# Altium PCB ISO-ASS[3]-VB.PcbDoc
Units mm, origin at the board's own origin, x right, y up, seen from the top; angles counter-clockwise.
Board outline 240 x 70 mm, 3 copper layers (Top Layer, MidLayer1, Bottom Layer); 157 components, 49 nets, 745 pads, 0 vias.
Unrouted connection lines stored in the file: 696.
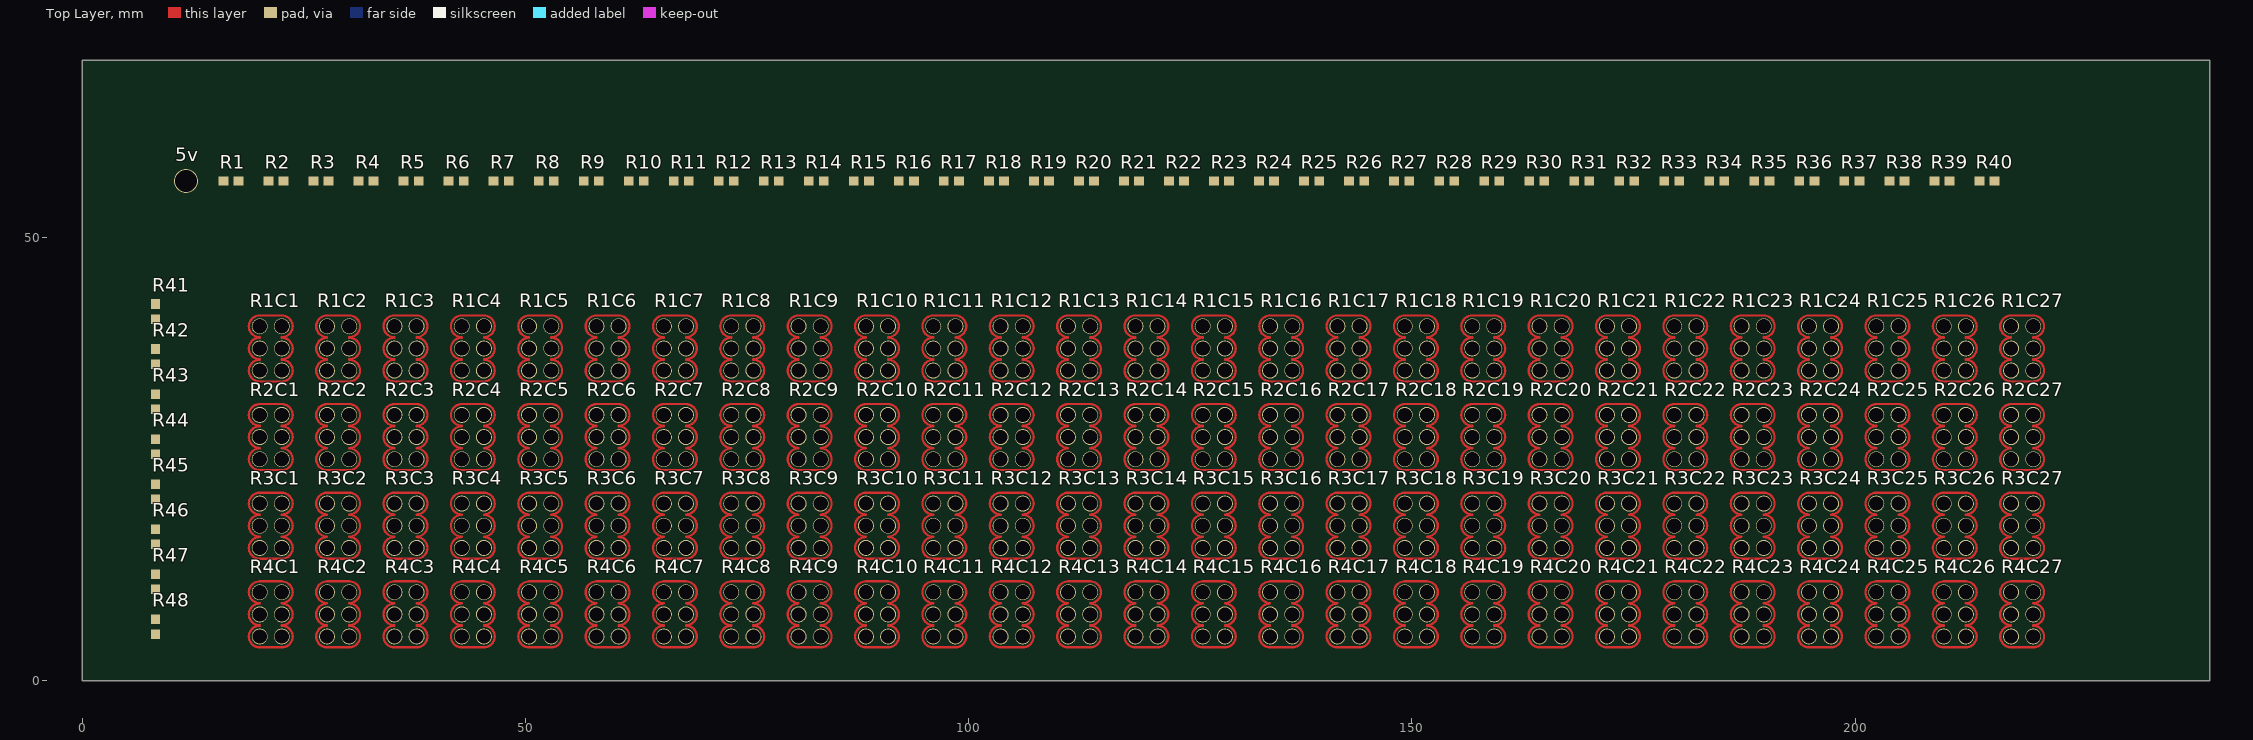
[diagram p0: Top Layer view]
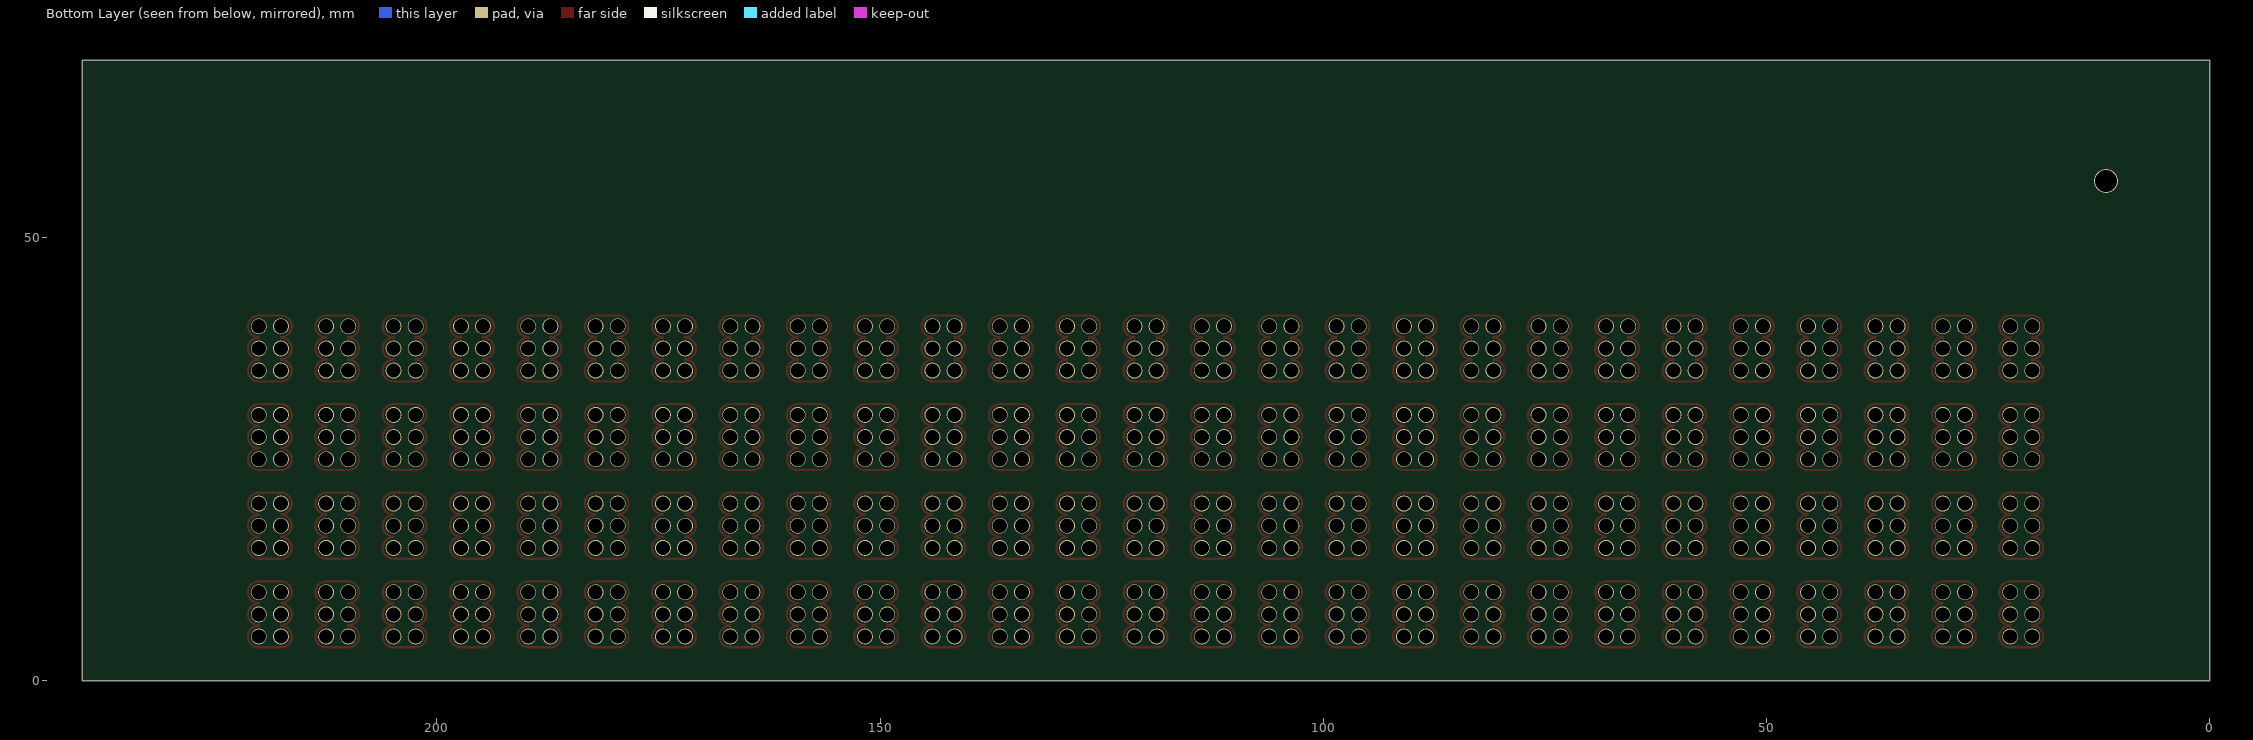
[diagram p1: Bottom Layer view, seen from below]

## Layer stack, top to bottom
Top Layer: signal copper 0.0356
Dielectric: core 0.32, FR-4, Dk 4.8
MidLayer1: signal copper 0.0356
Dielectric: prepreg 0.32, FR-4, Dk 4.8
Bottom Layer: signal copper 0.0356

## Board outline
0,0 240,0 240,70 0,70 0,0

## Design rules (kind name [scope] priority, off if disabled: settings)
Clearance [All] p1: gap=0.254
PolygonConnect [All] p1: connectstyle=Relief reliefconductorwidth=0.254 reliefentries=4 polygonreliefangle="90 Angle"
RoutingVias [All] p1: holewidth=0.711 width=1.27 viastyle="Through Hole" minholewidth=0.711 minwidth=1.27 maxholewidth=0.711 maxwidth=1.27
SilkscreenOverComponentPads [All] p1: minsilkscreentomaskgap=0.254
SolderMaskExpansion [All] p1: expansion=0.102
TestPointUsage [All] p1: valid=0 allowmultiple=FALSE
Testpoint [All] p1: side=15 testpointundercomponent=TRUE minsize=1.016 maxsize=2.54 preferedsize=1.524 minholesize=0 maxholesize=1.016 preferedholesize=0.813 testpointgrid=0.025 style=1023 order=0-112345678
Width [All] p1: maxlimit=0.254 minlimit=0.254 preferedwidth=0.254
23 further rules are at their usual default settings.

## Components (designator, comment, footprint, x,y, rotation, side; value= is the part's Value field where it differs from the comment)
5v "5v" 5v 11.684,56.388 r180 top
R1 "ERA3Y" ERA-0603 16.764,56.388 r180 top
R1C1 "BC-ASS[3]" BC-ASS[3] 20,35 r0 top
R1C2 "BC-ASS[3]" BC-ASS[3] 27.6,35 r0 top
R1C3 "BC-ASS[3]" BC-ASS[3] 35.2,35 r0 top
R1C4 "BC-ASS[3]" BC-ASS[3] 42.8,35 r0 top
R1C5 "BC-ASS[3]" BC-ASS[3] 50.4,35 r0 top
R1C6 "BC-ASS[3]" BC-ASS[3] 58,35 r0 top
R1C7 "BC-ASS[3]" BC-ASS[3] 65.6,35 r0 top
R1C8 "BC-ASS[3]" BC-ASS[3] 73.2,35 r0 top
R1C9 "BC-ASS[3]" BC-ASS[3] 80.8,35 r0 top
R1C10 "BC-ASS[3]" BC-ASS[3] 88.4,35 r0 top
R1C11 "BC-ASS[3]" BC-ASS[3] 96,35 r0 top
R1C12 "BC-ASS[3]" BC-ASS[3] 103.6,35 r0 top
R1C13 "BC-ASS[3]" BC-ASS[3] 111.2,35 r0 top
R1C14 "BC-ASS[3]" BC-ASS[3] 118.8,35 r0 top
R1C15 "BC-ASS[3]" BC-ASS[3] 126.4,35 r0 top
R1C16 "BC-ASS[3]" BC-ASS[3] 134,35 r0 top
R1C17 "BC-ASS[3]" BC-ASS[3] 141.6,35 r0 top
R1C18 "BC-ASS[3]" BC-ASS[3] 149.2,35 r0 top
R1C19 "BC-ASS[3]" BC-ASS[3] 156.8,35 r0 top
R1C20 "BC-ASS[3]" BC-ASS[3] 164.4,35 r0 top
R1C21 "BC-ASS[3]" BC-ASS[3] 172,35 r0 top
R1C22 "BC-ASS[3]" BC-ASS[3] 179.6,35 r0 top
R1C23 "BC-ASS[3]" BC-ASS[3] 187.2,35 r0 top
R1C24 "BC-ASS[3]" BC-ASS[3] 194.8,35 r0 top
R1C25 "BC-ASS[3]" BC-ASS[3] 202.4,35 r0 top
R1C26 "BC-ASS[3]" BC-ASS[3] 210,35 r0 top
R1C27 "BC-ASS[3]" BC-ASS[3] 217.6,35 r0 top
R2 "ERA3Y" ERA-0603 21.844,56.388 r0 top
R2C1 "BC-ASS[3]" BC-ASS[3] 20,25 r0 top
R2C2 "BC-ASS[3]" BC-ASS[3] 27.6,25 r0 top
R2C3 "BC-ASS[3]" BC-ASS[3] 35.2,25 r0 top
R2C4 "BC-ASS[3]" BC-ASS[3] 42.8,25 r0 top
R2C5 "BC-ASS[3]" BC-ASS[3] 50.4,25 r0 top
R2C6 "BC-ASS[3]" BC-ASS[3] 58,25 r0 top
R2C7 "BC-ASS[3]" BC-ASS[3] 65.6,25 r0 top
R2C8 "BC-ASS[3]" BC-ASS[3] 73.2,25 r0 top
R2C9 "BC-ASS[3]" BC-ASS[3] 80.8,25 r0 top
R2C10 "BC-ASS[3]" BC-ASS[3] 88.4,25 r0 top
R2C11 "BC-ASS[3]" BC-ASS[3] 96,25 r0 top
R2C12 "BC-ASS[3]" BC-ASS[3] 103.6,25 r0 top
R2C13 "BC-ASS[3]" BC-ASS[3] 111.2,25 r0 top
R2C14 "BC-ASS[3]" BC-ASS[3] 118.8,25 r0 top
R2C15 "BC-ASS[3]" BC-ASS[3] 126.4,25 r0 top
R2C16 "BC-ASS[3]" BC-ASS[3] 134,25 r0 top
R2C17 "BC-ASS[3]" BC-ASS[3] 141.6,25 r0 top
R2C18 "BC-ASS[3]" BC-ASS[3] 149.2,25 r0 top
R2C19 "BC-ASS[3]" BC-ASS[3] 156.8,25 r0 top
R2C20 "BC-ASS[3]" BC-ASS[3] 164.4,25 r0 top
R2C21 "BC-ASS[3]" BC-ASS[3] 172,25 r0 top
R2C22 "BC-ASS[3]" BC-ASS[3] 179.6,25 r0 top
R2C23 "BC-ASS[3]" BC-ASS[3] 187.2,25 r0 top
R2C24 "BC-ASS[3]" BC-ASS[3] 194.8,25 r0 top
R2C25 "BC-ASS[3]" BC-ASS[3] 202.4,25 r0 top
R2C26 "BC-ASS[3]" BC-ASS[3] 210,25 r0 top
R2C27 "BC-ASS[3]" BC-ASS[3] 217.6,25 r0 top
R3 "ERA3Y" ERA-0603 26.924,56.388 r180 top
R3C1 "BC-ASS[3]" BC-ASS[3] 20,15 r0 top
R3C2 "BC-ASS[3]" BC-ASS[3] 27.6,15 r0 top
R3C3 "BC-ASS[3]" BC-ASS[3] 35.2,15 r0 top
R3C4 "BC-ASS[3]" BC-ASS[3] 42.8,15 r0 top
R3C5 "BC-ASS[3]" BC-ASS[3] 50.4,15 r0 top
R3C6 "BC-ASS[3]" BC-ASS[3] 58,15 r0 top
R3C7 "BC-ASS[3]" BC-ASS[3] 65.6,15 r0 top
R3C8 "BC-ASS[3]" BC-ASS[3] 73.2,15 r0 top
R3C9 "BC-ASS[3]" BC-ASS[3] 80.8,15 r0 top
R3C10 "BC-ASS[3]" BC-ASS[3] 88.4,15 r0 top
R3C11 "BC-ASS[3]" BC-ASS[3] 96,15 r0 top
R3C12 "BC-ASS[3]" BC-ASS[3] 103.6,15 r0 top
R3C13 "BC-ASS[3]" BC-ASS[3] 111.2,15 r0 top
R3C14 "BC-ASS[3]" BC-ASS[3] 118.8,15 r0 top
R3C15 "BC-ASS[3]" BC-ASS[3] 126.4,15 r0 top
R3C16 "BC-ASS[3]" BC-ASS[3] 134,15 r0 top
R3C17 "BC-ASS[3]" BC-ASS[3] 141.6,15 r0 top
R3C18 "BC-ASS[3]" BC-ASS[3] 149.2,15 r0 top
R3C19 "BC-ASS[3]" BC-ASS[3] 156.8,15 r0 top
R3C20 "BC-ASS[3]" BC-ASS[3] 164.4,15 r0 top
R3C21 "BC-ASS[3]" BC-ASS[3] 172,15 r0 top
R3C22 "BC-ASS[3]" BC-ASS[3] 179.6,15 r0 top
R3C23 "BC-ASS[3]" BC-ASS[3] 187.2,15 r0 top
R3C24 "BC-ASS[3]" BC-ASS[3] 194.8,15 r0 top
R3C25 "BC-ASS[3]" BC-ASS[3] 202.4,15 r0 top
R3C26 "BC-ASS[3]" BC-ASS[3] 210,15 r0 top
R3C27 "BC-ASS[3]" BC-ASS[3] 217.6,15 r0 top
R4 "ERA3Y" ERA-0603 32.004,56.388 r0 top
R4C1 "BC-ASS[3]" BC-ASS[3] 20,5 r0 top
R4C2 "BC-ASS[3]" BC-ASS[3] 27.6,5 r0 top
R4C3 "BC-ASS[3]" BC-ASS[3] 35.2,5 r0 top
R4C4 "BC-ASS[3]" BC-ASS[3] 42.8,5 r0 top
R4C5 "BC-ASS[3]" BC-ASS[3] 50.4,5 r0 top
R4C6 "BC-ASS[3]" BC-ASS[3] 58,5 r0 top
R4C7 "BC-ASS[3]" BC-ASS[3] 65.6,5 r0 top
R4C8 "BC-ASS[3]" BC-ASS[3] 73.2,5 r0 top
R4C9 "BC-ASS[3]" BC-ASS[3] 80.8,5 r0 top
R4C10 "BC-ASS[3]" BC-ASS[3] 88.4,5 r0 top
R4C11 "BC-ASS[3]" BC-ASS[3] 96,5 r0 top
R4C12 "BC-ASS[3]" BC-ASS[3] 103.6,5 r0 top
R4C13 "BC-ASS[3]" BC-ASS[3] 111.2,5 r0 top
R4C14 "BC-ASS[3]" BC-ASS[3] 118.8,5 r0 top
R4C15 "BC-ASS[3]" BC-ASS[3] 126.4,5 r0 top
R4C16 "BC-ASS[3]" BC-ASS[3] 134,5 r0 top
R4C17 "BC-ASS[3]" BC-ASS[3] 141.6,5 r0 top
R4C18 "BC-ASS[3]" BC-ASS[3] 149.2,5 r0 top
R4C19 "BC-ASS[3]" BC-ASS[3] 156.8,5 r0 top
R4C20 "BC-ASS[3]" BC-ASS[3] 164.4,5 r0 top
R4C21 "BC-ASS[3]" BC-ASS[3] 172,5 r0 top
R4C22 "BC-ASS[3]" BC-ASS[3] 179.6,5 r0 top
R4C23 "BC-ASS[3]" BC-ASS[3] 187.2,5 r0 top
R4C24 "BC-ASS[3]" BC-ASS[3] 194.8,5 r0 top
R4C25 "BC-ASS[3]" BC-ASS[3] 202.4,5 r0 top
R4C26 "BC-ASS[3]" BC-ASS[3] 210,5 r0 top
R4C27 "BC-ASS[3]" BC-ASS[3] 217.6,5 r0 top
R5 "ERA3Y" ERA-0603 37.084,56.388 r180 top
R6 "ERA3Y" ERA-0603 42.164,56.388 r0 top
R7 "ERA3Y" ERA-0603 47.244,56.388 r180 top
R8 "ERA3Y" ERA-0603 52.324,56.388 r0 top
R9 "ERA3Y" ERA-0603 57.404,56.388 r180 top
R10 "ERA3Y" ERA-0603 62.484,56.388 r0 top
R11 "ERA3Y" ERA-0603 67.564,56.388 r180 top
R12 "ERA3Y" ERA-0603 72.644,56.388 r0 top
R13 "ERA3Y" ERA-0603 77.724,56.388 r180 top
R14 "ERA3Y" ERA-0603 82.804,56.388 r0 top
R15 "ERA3Y" ERA-0603 87.884,56.388 r180 top
R16 "ERA3Y" ERA-0603 92.964,56.388 r0 top
R17 "ERA3Y" ERA-0603 98.044,56.388 r180 top
R18 "ERA3Y" ERA-0603 103.124,56.388 r0 top
R19 "ERA3Y" ERA-0603 108.204,56.388 r180 top
R20 "ERA3Y" ERA-0603 113.284,56.388 r0 top
R21 "ERA3Y" ERA-0603 118.364,56.388 r180 top
R22 "ERA3Y" ERA-0603 123.444,56.388 r0 top
R23 "ERA3Y" ERA-0603 128.524,56.388 r180 top
R24 "ERA3Y" ERA-0603 133.604,56.388 r0 top
R25 "ERA3Y" ERA-0603 138.684,56.388 r180 top
R26 "ERA3Y" ERA-0603 143.764,56.388 r0 top
R27 "ERA3Y" ERA-0603 148.844,56.388 r180 top
R28 "ERA3Y" ERA-0603 153.924,56.388 r180 top
R29 "ERA3Y" ERA-0603 159.004,56.388 r0 top
R30 "ERA3Y" ERA-0603 164.084,56.388 r180 top
R31 "ERA3Y" ERA-0603 169.164,56.388 r180 top
R32 "ERA3Y" ERA-0603 174.244,56.388 r180 top
R33 "ERA3Y" ERA-0603 179.324,56.388 r180 top
R34 "ERA3Y" ERA-0603 184.404,56.388 r180 top
R35 "ERA3Y" ERA-0603 189.484,56.388 r180 top
R36 "ERA3Y" ERA-0603 194.564,56.388 r180 top
R37 "ERA3Y" ERA-0603 199.644,56.388 r180 top
R38 "ERA3Y" ERA-0603 204.724,56.388 r180 top
R39 "ERA3Y" ERA-0603 209.804,56.388 r180 top
R40 "ERA3Y" ERA-0603 214.884,56.388 r180 top
R41 "ERA3Y" ERA-0603 8.255,41.656 r90 top
R42 "ERA3Y" ERA-0603 8.255,36.576 r90 top
R43 "ERA3Y" ERA-0603 8.255,31.496 r90 top
R44 "ERA3Y" ERA-0603 8.255,26.416 r90 top
R45 "ERA3Y" ERA-0603 8.255,21.336 r90 top
R46 "ERA3Y" ERA-0603 8.255,16.256 r90 top
R47 "ERA3Y" ERA-0603 8.255,11.176 r90 top
R48 "ERA3Y" ERA-0603 8.255,6.096 r90 top

## Footprints (in the part's own frame and the unit in brackets; to place one, negate y for a bottom-side part, rotate by r counter-clockwise, add the part's x,y. Pads: shape width x height; smd on the part's side, far side on the other; paste and mask are expansions set on the pad)
5v [mm]
  round 2.7 hole 2.5: 0(0,0)
BC-ASS[3] [mm] "American Standard Sign [3]"
  round 1.8 hole 1.6: 1(0,5) 2(0,2.5) 3(0,0) 4(2.5,5) 5(2.5,2.5) 6(2.5,0)
  Top Layer lines w0.254: 0,1.223 ccw(c0,0) 0,-1.223 2.5,-1.223 ccw(c2.5,0) 2.5,1.223 ; 0,1.277 cw(c0,2.5) 0,3.723 ; 0,3.777 cw(c0,5) 0,6.223 2.5,6.223 cw(c2.5,5) 2.5,3.777 ; 2.5,1.277 ccw(c2.5,2.5) 2.5,3.723
ERA-0603 [mm] "Chip Resistor; Body 1.6 x 0.8 mm (LxW typ)"
  rect 1.1x1 smd: 1(-0.85,0) 2(0.85,0)

## Part data
R1 R2 R3 R4 R5 R6 R7 R8 R9 R10 R11 R12 R13 R14 R15 R16 R17 R18 R19 R20 R21 R22 R23 R24 R25 R26 R27 R28 R29 R30 R31 R32 R33 R34 R35 R36 R37 R38 R39 R40 R41 R42 R43 R44 R45 R46 R47 R48: "Rectangular Thick Film Chip Resistor, 10 Ohm to 330k Ohm Range, 0.1% and 0.5% Tolerance, 0603 Size, 0.063 W"

## Nets (pads, with @x,y where several pads share a name; then routed paths per layer and width w, separated by ;. In a path a pad name is that pad's centre, name@x,y a point inside that pad or via, vN(x,y) a via of type N, cw(c..) or ccw(c..) an arc to the next point about the centre after c; other vN are vias at no path point)
Net5v_0: 5v.0 R1.2
NetR1_1: R1.1 R1C1.1 R1C3.1 R1C5.1 R1C7.1 R1C9.1 R1C11.1 R1C13.1 R1C15.1 R1C17.1 R1C19.1 R1C21.1 R1C23.1 R1C25.1 R1C27.1 R2.1
NetR1C1_2: R1C1.2 R1C3.2 R1C5.2 R1C7.2 R1C9.2 R1C11.2 R1C13.2 R1C15.2 R1C17.2 R1C19.2 R1C21.2 R1C23.2 R1C25.2 R1C27.2 R2.2 R3.2
NetR1C1_3: R1C1.3 R1C3.3 R1C5.3 R1C7.3 R1C9.3 R1C11.3 R1C13.3 R1C15.3 R1C17.3 R1C19.3 R1C21.3 R1C23.3 R1C25.3 R1C27.3 R3.1 R4.1
NetR1C1_4: R1C1.4 R1C3.4 R1C5.4 R1C7.4 R1C9.4 R1C11.4 R1C13.4 R1C15.4 R1C17.4 R1C19.4 R1C21.4 R1C23.4 R1C25.4 R1C27.4 R4.2 R5.2
NetR1C1_5: R1C1.5 R1C3.5 R1C5.5 R1C7.5 R1C9.5 R1C11.5 R1C13.5 R1C15.5 R1C17.5 R1C19.5 R1C21.5 R1C23.5 R1C25.5 R1C27.5 R5.1 R6.1
NetR1C1_6: R1C1.6 R1C3.6 R1C5.6 R1C7.6 R1C9.6 R1C11.6 R1C13.6 R1C15.6 R1C17.6 R1C19.6 R1C21.6 R1C23.6 R1C25.6 R1C27.6 R6.2 R7.2
NetR1C2_1: R1C2.1 R1C4.1 R1C6.1 R1C8.1 R1C10.1 R1C12.1 R1C14.1 R1C16.1 R1C18.1 R1C20.1 R1C22.1 R1C24.1 R1C26.1 R25.1 R26.1
NetR1C2_2: R1C2.2 R1C4.2 R1C6.2 R1C8.2 R1C10.2 R1C12.2 R1C14.2 R1C16.2 R1C18.2 R1C20.2 R1C22.2 R1C24.2 R1C26.2 R26.2 R27.2
NetR1C2_3: R1C2.3 R1C4.3 R1C6.3 R1C8.3 R1C10.3 R1C12.3 R1C14.3 R1C16.3 R1C18.3 R1C20.3 R1C22.3 R1C24.3 R1C26.3 R27.1 R28.2
NetR1C2_4: R1C2.4 R1C4.4 R1C6.4 R1C8.4 R1C10.4 R1C12.4 R1C14.4 R1C16.4 R1C18.4 R1C20.4 R1C22.4 R1C24.4 R1C26.4 R28.1 R29.2
NetR1C2_5: R1C2.5 R1C4.5 R1C6.5 R1C8.5 R1C10.5 R1C12.5 R1C14.5 R1C16.5 R1C18.5 R1C20.5 R1C22.5 R1C24.5 R1C26.5 R29.1 R30.2
NetR1C2_6: R1C2.6 R1C4.6 R1C6.6 R1C8.6 R1C10.6 R1C12.6 R1C14.6 R1C16.6 R1C18.6 R1C20.6 R1C22.6 R1C24.6 R1C26.6 R30.1 R31.2
NetR2C1_1: R2C1.1 R2C3.1 R2C5.1 R2C7.1 R2C9.1 R2C11.1 R2C13.1 R2C15.1 R2C17.1 R2C19.1 R2C21.1 R2C23.1 R2C25.1 R2C27.1 R7.1 R8.1
NetR2C1_2: R2C1.2 R2C3.2 R2C5.2 R2C7.2 R2C9.2 R2C11.2 R2C13.2 R2C15.2 R2C17.2 R2C19.2 R2C21.2 R2C23.2 R2C25.2 R2C27.2 R8.2 R9.2
NetR2C1_3: R2C1.3 R2C3.3 R2C5.3 R2C7.3 R2C9.3 R2C11.3 R2C13.3 R2C15.3 R2C17.3 R2C19.3 R2C21.3 R2C23.3 R2C25.3 R2C27.3 R9.1 R10.1
NetR2C1_4: R2C1.4 R2C3.4 R2C5.4 R2C7.4 R2C9.4 R2C11.4 R2C13.4 R2C15.4 R2C17.4 R2C19.4 R2C21.4 R2C23.4 R2C25.4 R2C27.4 R10.2 R11.2
NetR2C1_5: R2C1.5 R2C3.5 R2C5.5 R2C7.5 R2C9.5 R2C11.5 R2C13.5 R2C15.5 R2C17.5 R2C19.5 R2C21.5 R2C23.5 R2C25.5 R2C27.5 R11.1 R12.1
NetR2C1_6: R2C1.6 R2C3.6 R2C5.6 R2C7.6 R2C9.6 R2C11.6 R2C13.6 R2C15.6 R2C17.6 R2C19.6 R2C21.6 R2C23.6 R2C25.6 R2C27.6 R12.2 R13.2
NetR2C2_1: R2C2.1 R2C4.1 R2C6.1 R2C8.1 R2C10.1 R2C12.1 R2C14.1 R2C16.1 R2C18.1 R2C20.1 R2C22.1 R2C24.1 R2C26.1 R31.1 R32.2
NetR2C2_2: R2C2.2 R2C4.2 R2C6.2 R2C8.2 R2C10.2 R2C12.2 R2C14.2 R2C16.2 R2C18.2 R2C20.2 R2C22.2 R2C24.2 R2C26.2 R32.1 R33.2
NetR2C2_3: R2C2.3 R2C4.3 R2C6.3 R2C8.3 R2C10.3 R2C12.3 R2C14.3 R2C16.3 R2C18.3 R2C20.3 R2C22.3 R2C24.3 R2C26.3 R33.1 R34.2
NetR2C2_4: R2C2.4 R2C4.4 R2C6.4 R2C8.4 R2C10.4 R2C12.4 R2C14.4 R2C16.4 R2C18.4 R2C20.4 R2C22.4 R2C24.4 R2C26.4 R34.1 R35.2
NetR2C2_5: R2C2.5 R2C4.5 R2C6.5 R2C8.5 R2C10.5 R2C12.5 R2C14.5 R2C16.5 R2C18.5 R2C20.5 R2C22.5 R2C24.5 R2C26.5 R35.1 R36.2
NetR2C2_6: R2C2.6 R2C4.6 R2C6.6 R2C8.6 R2C10.6 R2C12.6 R2C14.6 R2C16.6 R2C18.6 R2C20.6 R2C22.6 R2C24.6 R2C26.6 R36.1 R37.2
NetR3C1_1: R3C1.1 R3C3.1 R3C5.1 R3C7.1 R3C9.1 R3C11.1 R3C13.1 R3C15.1 R3C17.1 R3C19.1 R3C21.1 R3C23.1 R3C25.1 R3C27.1 R13.1 R14.1
NetR3C1_2: R3C1.2 R3C3.2 R3C5.2 R3C7.2 R3C9.2 R3C11.2 R3C13.2 R3C15.2 R3C17.2 R3C19.2 R3C21.2 R3C23.2 R3C25.2 R3C27.2 R14.2 R15.2
NetR3C1_3: R3C1.3 R3C3.3 R3C5.3 R3C7.3 R3C9.3 R3C11.3 R3C13.3 R3C15.3 R3C17.3 R3C19.3 R3C21.3 R3C23.3 R3C25.3 R3C27.3 R15.1 R16.1
NetR3C1_4: R3C1.4 R3C3.4 R3C5.4 R3C7.4 R3C9.4 R3C11.4 R3C13.4 R3C15.4 R3C17.4 R3C19.4 R3C21.4 R3C23.4 R3C25.4 R3C27.4 R16.2 R17.2
NetR3C1_5: R3C1.5 R3C3.5 R3C5.5 R3C7.5 R3C9.5 R3C11.5 R3C13.5 R3C15.5 R3C17.5 R3C19.5 R3C21.5 R3C23.5 R3C25.5 R3C27.5 R17.1 R18.1
NetR3C1_6: R3C1.6 R3C3.6 R3C5.6 R3C7.6 R3C9.6 R3C11.6 R3C13.6 R3C15.6 R3C17.6 R3C19.6 R3C21.6 R3C23.6 R3C25.6 R3C27.6 R18.2 R19.2
NetR3C2_1: R3C2.1 R3C4.1 R3C6.1 R3C8.1 R3C10.1 R3C12.1 R3C14.1 R3C16.1 R3C18.1 R3C20.1 R3C22.1 R3C24.1 R3C26.1 R37.1 R38.2
NetR3C2_2: R3C2.2 R3C4.2 R3C6.2 R3C8.2 R3C10.2 R3C12.2 R3C14.2 R3C16.2 R3C18.2 R3C20.2 R3C22.2 R3C24.2 R3C26.2 R38.1 R39.2
NetR3C2_3: R3C2.3 R3C4.3 R3C6.3 R3C8.3 R3C10.3 R3C12.3 R3C14.3 R3C16.3 R3C18.3 R3C20.3 R3C22.3 R3C24.3 R3C26.3 R39.1 R40.2
NetR3C2_4: R3C2.4 R3C4.4 R3C6.4 R3C8.4 R3C10.4 R3C12.4 R3C14.4 R3C16.4 R3C18.4 R3C20.4 R3C22.4 R3C24.4 R3C26.4 R40.1 R41.2
NetR3C2_5: R3C2.5 R3C4.5 R3C6.5 R3C8.5 R3C10.5 R3C12.5 R3C14.5 R3C16.5 R3C18.5 R3C20.5 R3C22.5 R3C24.5 R3C26.5 R41.1 R42.2
NetR3C2_6: R3C2.6 R3C4.6 R3C6.6 R3C8.6 R3C10.6 R3C12.6 R3C14.6 R3C16.6 R3C18.6 R3C20.6 R3C22.6 R3C24.6 R3C26.6 R42.1 R43.2
NetR4C1_1: R4C1.1 R4C3.1 R4C5.1 R4C7.1 R4C9.1 R4C11.1 R4C13.1 R4C15.1 R4C17.1 R4C19.1 R4C21.1 R4C23.1 R4C25.1 R4C27.1 R19.1 R20.1
NetR4C1_2: R4C1.2 R4C3.2 R4C5.2 R4C7.2 R4C9.2 R4C11.2 R4C13.2 R4C15.2 R4C17.2 R4C19.2 R4C21.2 R4C23.2 R4C25.2 R4C27.2 R20.2 R21.2
NetR4C1_3: R4C1.3 R4C3.3 R4C5.3 R4C7.3 R4C9.3 R4C11.3 R4C13.3 R4C15.3 R4C17.3 R4C19.3 R4C21.3 R4C23.3 R4C25.3 R4C27.3 R21.1 R22.1
NetR4C1_4: R4C1.4 R4C3.4 R4C5.4 R4C7.4 R4C9.4 R4C11.4 R4C13.4 R4C15.4 R4C17.4 R4C19.4 R4C21.4 R4C23.4 R4C25.4 R4C27.4 R22.2 R23.2
NetR4C1_5: R4C1.5 R4C3.5 R4C5.5 R4C7.5 R4C9.5 R4C11.5 R4C13.5 R4C15.5 R4C17.5 R4C19.5 R4C21.5 R4C23.5 R4C25.5 R4C27.5 R23.1 R24.1
NetR4C1_6: R4C1.6 R4C3.6 R4C5.6 R4C7.6 R4C9.6 R4C11.6 R4C13.6 R4C15.6 R4C17.6 R4C19.6 R4C21.6 R4C23.6 R4C25.6 R4C27.6 R24.2 R25.2
NetR4C2_1: R4C2.1 R4C4.1 R4C6.1 R4C8.1 R4C10.1 R4C12.1 R4C14.1 R4C16.1 R4C18.1 R4C20.1 R4C22.1 R4C24.1 R4C26.1 R43.1 R44.2
NetR4C2_2: R4C2.2 R4C4.2 R4C6.2 R4C8.2 R4C10.2 R4C12.2 R4C14.2 R4C16.2 R4C18.2 R4C20.2 R4C22.2 R4C24.2 R4C26.2 R44.1 R45.2
NetR4C2_3: R4C2.3 R4C4.3 R4C6.3 R4C8.3 R4C10.3 R4C12.3 R4C14.3 R4C16.3 R4C18.3 R4C20.3 R4C22.3 R4C24.3 R4C26.3 R45.1 R46.2
NetR4C2_4: R4C2.4 R4C4.4 R4C6.4 R4C8.4 R4C10.4 R4C12.4 R4C14.4 R4C16.4 R4C18.4 R4C20.4 R4C22.4 R4C24.4 R4C26.4 R46.1 R47.2
NetR4C2_5: R4C2.5 R4C4.5 R4C6.5 R4C8.5 R4C10.5 R4C12.5 R4C14.5 R4C16.5 R4C18.5 R4C20.5 R4C22.5 R4C24.5 R4C26.5 R47.1 R48.2
NetR4C2_6: R4C2.6 R4C4.6 R4C6.6 R4C8.6 R4C10.6 R4C12.6 R4C14.6 R4C16.6 R4C18.6 R4C20.6 R4C22.6 R4C24.6 R4C26.6 R48.1